# EAGLE board schematics (EAGLE 9.7.0)

Size 180.5 x 83.98 mm. Coordinates in mm from the lower left corner, seen from the top.
Outline: 0,0 180.5,0 180.5,83.97 0,83.97 0,0
Copper layers (1*16): Top 0.035mm / dielectric 1.5mm / Bottom 0.035mm
Design rules "default": minimum track width 6mil, minimum drill 0.35mm, track to track 6mil, track to pad 6mil, pad to pad 6mil, via to via 6mil, smd to smd 6mil, copper to edge 40mil, drill to drill 6mil, minimum pad ring 10mil, minimum via ring 8mil, stop-mask expansion 4mil, vias tented up to drill 0mil, thermal gap 10mil

## Footprints (pad centres in the part's own frame; a part is rotated, then mirrored left to right if it is on the bottom)
WS2812-STRIP = drill 1.016 long: 1 -3.81,0; 2 -1.27,0; 3 1.27,0; 4 3.81,0
BATTERY-GENERIC = drill 1.118 pad 3.15 octagon: + 2.54,0; - -2.54,0
ARDUINO-UNO-R3-SHIELD = drill 1.016 pad 1.88: 3.3V 24.13,-2.54; 5V 24.13,0; A0 24.13,12.7; A1 24.13,15.24; A2 24.13,17.78; A3 24.13,20.32; A4 24.13,22.86; A5 24.13,25.4; AREF -24.13,-13.97; D2 -24.13,20.32; D3 -24.13,17.78; D4 -24.13,15.24; D5 -24.13,12.7; D6 -24.13,10.16; D7 -24.13,7.62; D8 -24.13,3.81; D9 -24.13,1.27; D10 -24.13,-1.27; D11 -24.13,-3.81; D12 -24.13,-6.35; D13 -24.13,-8.89; GND@0 24.13,2.54; GND@1 24.13,5.08; GND@2 -24.13,-11.43; IOREF 24.13,-7.62; NC 24.13,-10.16; RES 24.13,-5.08; RX -24.13,25.4; SCL -24.13,-19.05; SDA -24.13,-16.51; TX -24.13,22.86; VIN 24.13,7.62

## Placement (x,y rotation side)
LED1  WS2812B_STRIP  [WS2812-STRIP]  33.23,7.75 270 top
LED2  WS2812B_STRIP  [WS2812-STRIP]  172.76,16.64 0 top
P1  BATTERYGENERIC  [BATTERY-GENERIC]  8.26,28.82 180 top
U2  ARDUINO-UNO-R3-SHIELD  [ARDUINO-UNO-R3-SHIELD]  117.94,54.13 270 top

## Library data of the parts
LED1 LED2 P1 U2 = Tinkercad

## Nets
LED1_DOUT: LED1.4 LED2.1
P1+: LED1.2 LED2.2 P1.+
P1-: LED1.3 LED2.3 P1.- U2.GND@0 U2.GND@1 U2.GND@2
U2_D7: LED1.1 U2.D7

## Tracks (layer width: path | path; a pad name or v marks a point on that pad's centre or on a via)
LED1_DOUT  (1 unrouted)
P1+  (2 unrouted)
P1-  (5 unrouted)
U2_D7  (1 unrouted)